# Altium PCB x-Link.PcbDoc
Units mm, origin at the board's own origin, x right, y up, seen from the top; angles counter-clockwise.
Board outline 30 x 18 mm, 2 copper layers (Top Layer, Bottom Layer), stack 1.06 mm thick; 48 components, 35 nets, 156 pads, 76 vias.
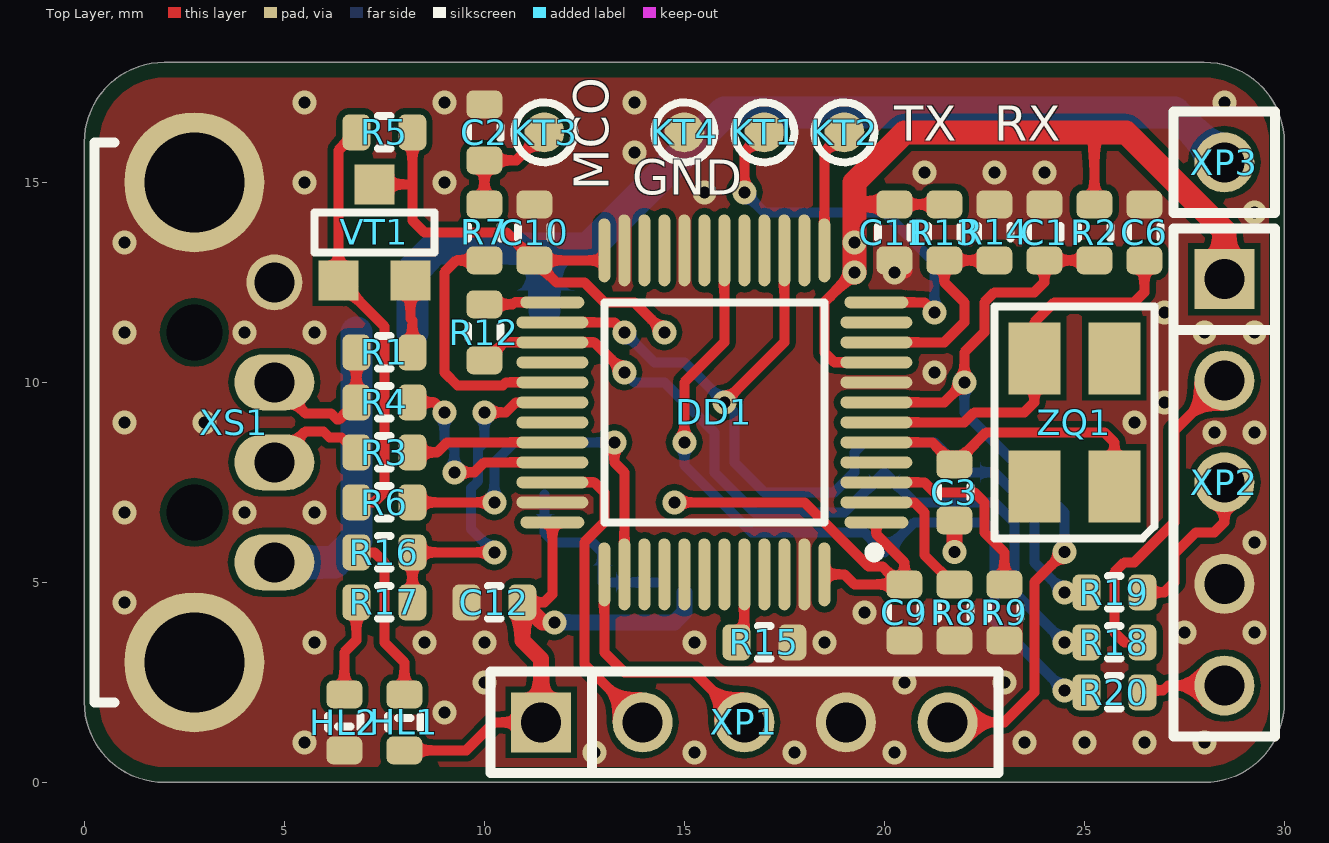
[diagram p0: Top Layer view]
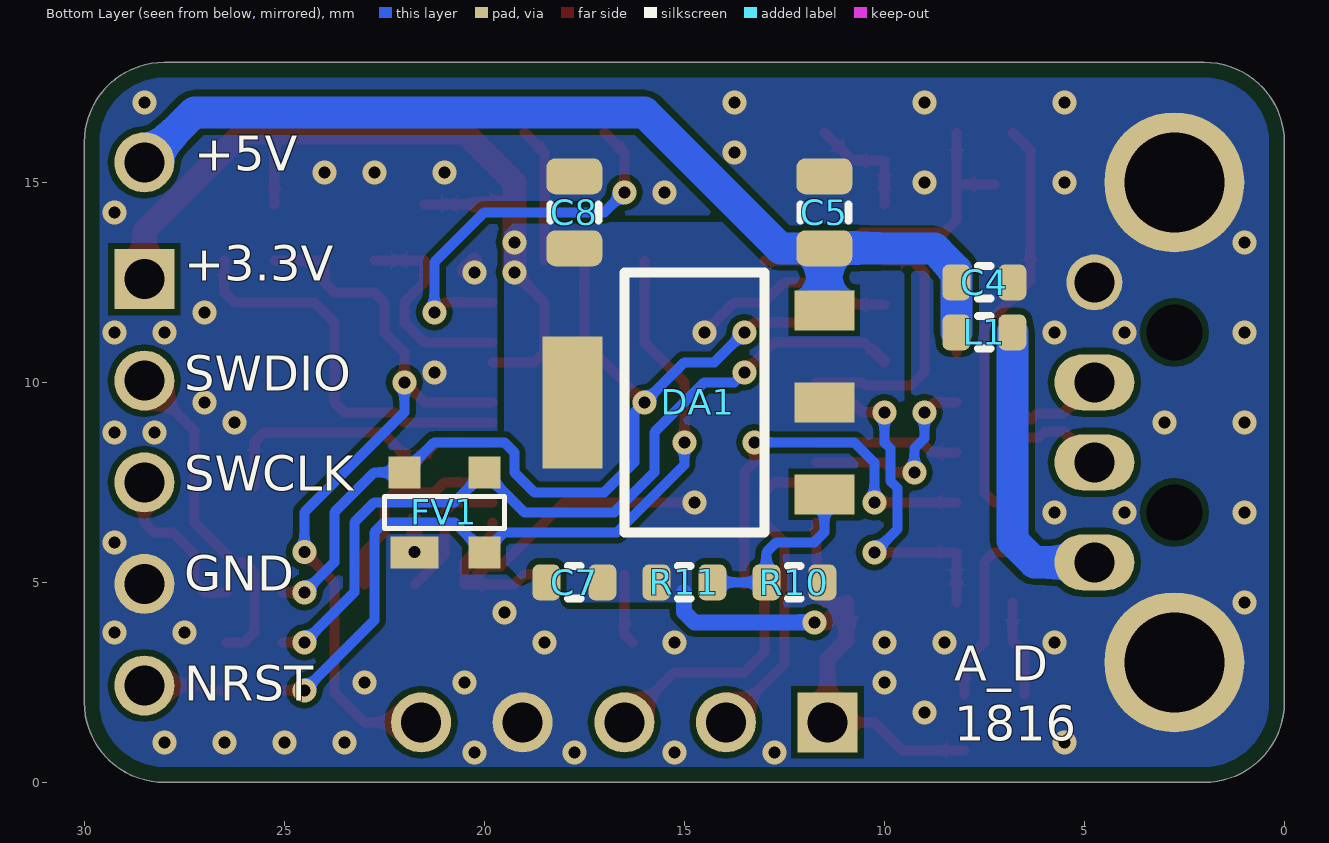
[diagram p1: Bottom Layer view, seen from below]

## Layer stack, top to bottom
Top Solder: solder mask 0.01, Solder Resist, Dk 3.5
Top Layer: signal copper 0.03
Dielectric1: core 1, FR-4, Dk 4.2
Bottom Layer: signal copper 0.03
Bottom Solder: solder mask 0.01, Solder Resist, Dk 3.5

## Board outline
0,2 0,16 cw(c2,16) 2,18 28,18 cw(c28,16) 30,16 30,2 cw(c28,2) 28,0 2,0 cw(c2,2)

## Design rules (kind name [scope] priority, off if disabled: settings)
BoardOutlineClearance [All] p1: gap=0.381 ignorepadtopadclearanceinfootprint=FALSE
Clearance [All] p1: gap=0.152 ignorepadtopadclearanceinfootprint=FALSE except(0: Arc-Hole Track-Hole SMDPad-Hole THPad-Hole Via-Hole Fill-Hole Poly-Hole Region-Hole Text-Hole)
ComponentClearance [All] p1: gap=0.25 collisioncheckmode=3 verticalgap=0.25 showdistances=FALSE
DiffPairsRouting [All] p1: maxlimit=10 minlimit=0.152 mostfreqgap=0.203 toplayer_minwidth=0.152 toplayer_maxwidth=0.381 toplayer_prefwidth=0.203 bottomlayer_minwidth=0.152 bottomlayer_maxwidth=0.381 bottomlayer_prefwidth=0.203 maxuncoupledlength=12.7
Height [All] p1: minheight=0 maxheight=25 prefheight=25
HoleSize [All] p1: absolutevalues=TRUE maxlimit=6.731 minlimit=0.3 maxpercent=80.000 minpercent=20.000
HoleToHoleClearance [All] p1: gap=0.254 allowstackedmicrovias=FALSE
MinimumAnnularRing [All] p1: minimumring=0.15
MinimumSolderMaskSliver [All] p1: minsoldermaskwidth=0
PlaneClearance [All] p1: clearance=0.5
PlaneConnect [All] p1: planeconnectstyle=Relief reliefexpansion=0.5 reliefentries=4 reliefconductorwidth=0.25 reliefairgap=0.25
PolygonConnect "Schematic Polygon Connect Style_6" [InNet('VCC5P0')] p1: connectstyle=Direct reliefconductorwidth=0.254 reliefentries=4 polygonreliefangle="45 Angle" airgapwidth=0.254
PolygonConnect "Schematic Polygon Connect Style_2" [InNet('GND')] p2: connectstyle=Direct reliefconductorwidth=0.254 reliefentries=4 polygonreliefangle="45 Angle" airgapwidth=0.254
PolygonConnect "Schematic Polygon Connect Style" [InNet('VCC3P3')] p3: connectstyle=Direct reliefconductorwidth=0.254 reliefentries=4 polygonreliefangle="45 Angle" airgapwidth=0.254
PolygonConnect [All] p4: connectstyle=Relief reliefconductorwidth=0.2 reliefentries=4 polygonreliefangle="90 Angle" airgapwidth=0.25
RoutingCorners [All] p1: cornerstyle=45-Degree minsetback=1.25 maxsetback=1.25
RoutingVias [All] p1: holewidth=0.3 width=0.6 viastyle="Through Hole" minholewidth=0.3 minwidth=0.6 maxholewidth=1 maxwidth=2
SMDEntry [All] p1: side=TRUE corner=TRUE anyangle=TRUE
SilkToSilkClearance [All] p1 off: silktosilkclearance=0
SilkToSolderMaskClearance [IsPad] p1 off: minsilkscreentomaskgap=0.152 clearancetoexposedcopper=TRUE
SolderMaskExpansion [All] p1: expansion=0.1
Width [All] p1: maxlimit=10.16 minlimit=0.152 preferedwidth=0.203
19 further rules are at their usual default settings.

## Classes and differential pairs
differential pair UD: +UD_P -UD_N
differential pair D: +D_P -D_N

## Components (designator, comment, footprint, x,y, rotation, side; value= is the part's Value field where it differs from the comment)
C1 "Capacitor" C0603_L 24,13.75 r270 top value=0.1uF
C2 "Capacitor" C0603_L 10,16.25 r270 top value=22pF
C3 "Capacitor" C0603_L 21.75,7.25 r90 top value=22pF
C4 "Capacitor" C0603_L 7.5,12.5 r0 bottom value=0.1uF
C5 "Capacitor" C0805_L 11.5,14.25 r90 bottom value=22uF
C6 "Capacitor" C0603_L 26.5,13.75 r270 top value=22pF
C7 "Capacitor" C0603_L 17.75,5 r180 bottom value=0.1uF
C8 "Capacitor" C0805_L 17.75,14.25 r90 bottom value=22uF
C9 "Capacitor" C0603_L 20.5,4.25 r90 top value=0.1uF
C10 "Capacitor" C0603_L 11.25,13.75 r270 top value=0.1uF
C11 "Capacitor" C0603_L 20.25,13.75 r90 top value=0.1uF
C12 "Capacitor" C0603_L 10.25,4.5 r0 top value=0.1uF
DA1 "LM1117-Series" SOT-223 14.75,9.5 r90 bottom value=LM1117MPX-ADJ
DD1 "STM32F103Cxxx-Series" LQFP-48 15.75,9.25 r180 top value=STM32F103C8T6
FV1 "SP0503BAHT" SOT-143 21,6.75 r180 bottom
HL1 "Text" LD0603_L 8,1.5 r90 top value=BL-LS0603GC
HL2 "Text" LD0603_L 6.5,1.5 r270 top value=BL-LS0603HC
KT1 "TX" TP-SMT-C-1mm-1 17,16.25 r0 top value=КТ-SMT-1
KT2 "RX" TP-SMT-C-1mm-1 19,16.25 r90 top value=КТ-SMT-1
KT3 "MCO" TP-SMT-C-1mm-1 11.5,16.25 r90 top value=КТ-SMT-1
KT4 "GND" TP-SMT-C-1mm-1 15,16.25 r90 top value=КТ-SMT-1
L1 "FerriteBead" L0603_L 7.5,11.25 r0 bottom value=BLM18PG331SN1
R1 "Resistor" R0603_L 7.5,10.75 r0 top value=1.5k
R2 "Resistor" R0603_L 25.25,13.75 r270 top value=10k
R3 "Resistor" R0603_L 7.5,8.25 r0 top value=22
R4 "Resistor" R0603_L 7.5,9.5 r0 top value=22
R5 "Resistor" R0603_L 7.5,16.25 r0 top value=4.7k
R6 "Resistor" R0603_L 7.5,7 r180 top value=100
R7 "Resistor" R0603_L 10,13.75 r90 top value=100
R8 "Resistor" R0603_L 21.75,4.25 r90 top value=10k
R9 "Resistor" R0603_L 23,4.25 r90 top value=10k
R10 "Resistor" R0603_L 12.25,5 r0 bottom value=0
R11 "Resistor" R0603_L 15,5 r0 bottom value=0
R12 "Resistor" R0603_L 10,11.25 r270 top value=100
R13 "Resistor" R0603_L 21.5,13.75 r90 top value=4.7k
R14 "Resistor" R0603_L 22.75,13.75 r270 top value=4.7k
R15 "Resistor" R0603_L 17,3.5 r180 top value=10k
R16 "Resistor" R0603_L 7.5,5.75 r0 top value=100
R17 "Resistor" R0603_L 7.5,4.5 r0 top value=100
R18 "Resistor" R0603_L 25.75,3.5 r0 top value=10
R19 "Resistor" R0603_L 25.75,4.75 r0 top value=10
R20 "Resistor" R0603_L 25.75,2.25 r0 top value=10
VT1 "BJT-NPN" SOT-23 7.25,13.75 r0 top value=BC847
XP1 "PROG" PLS-5 16.5,1.5 r0 top value=PLS-5
XP2 "SWD" PLS-5 28.5,7.5 r270 top value=PLS-5
XP3 "+5V" PLS-1 28.5,15.5 r0 top value=PLS-1
XS1 "Text" DS1097 3,9 r270 top locked value=DS1097-B
ZQ1 "Crystal" "SMD 5x3.2mm" 24.75,9 r90 top value="KX-9A 8.0 MHz 30/50/100 16 pF"

## Footprints (in the part's own frame and the unit in brackets; to place one, negate y for a bottom-side part, rotate by r counter-clockwise, add the part's x,y. Pads: shape width x height; smd on the part's side, far side on the other; paste and mask are expansions set on the pad)
C0603_L [mm] "Chip Capacitor; Body 1.6 x 0.8 mm (LxW typ)"
  rrect50% 0.7x0.9 smd: 1(-0.7,0) 2(0.7,0)
  silkscreen extent -0.15,-0.41 0.15,0.41, body extent -0.8,-0.4 0.8,0.4, height 0.91
C0805_L [mm] "Chip Capacitor; Body 2.0 x 1.2 mm (LxW typ)"
  rrect50% 0.9x1.4 smd: 1(-0.9,0) 2(0.9,0)
  silkscreen extent -0.2,-0.6 0.2,0.6, body extent -1,-0.62 1,0.63, height 1.01
DS1097 [mm]
  round 0 hole 1.4: 0(-2.25,-0.25) 0(2.25,-0.25)
  oval 1.4x2 hole 1: 1(3.5,1.75) 2(1,1.75) 3(-1,1.75)
  round 1.4 hole 1: 4(-3.5,1.75)
  round 3.5 hole 2.5: 5(-6,-0.25) 5(6,-0.25)
  silkscreen extent -7,-2.75 7,-2.25, body extent -6.3,-17.93 6.3,2, height 3.3
L0603_L [mm] "Chip Coil; Body 1.6 x 0.8 mm (LxW typ)"
  rrect50% 0.7x0.9 smd: 1(-0.7,0) 2(0.7,0)
  silkscreen extent -0.15,-0.41 0.15,0.41, body extent -0.8,-0.48 0.8,0.47, height 0.8
LD0603_L [mm] "Chip Led; Body 1.6 x 0.8 mm (LxW typ)"
  rrect50% 0.7x0.9 smd mask+0.05: 1(-0.7,0) 2(0.7,0)
  silkscreen extent -0.15,-0.41 0.15,0.41, body extent -0.8,-0.4 0.8,0.4, height 0.7
LQFP-48 [mm] "Thin QFP, 48-Leads, Body 7x7mm, Pitch 0.5mm, IPC Medium Density"
  oval 1.6x0.3 smd: 1(-4.05,2.75) 12(-4.05,-2.75) 25(4.05,-2.75) 36(4.05,2.75)
  oval 1.8x0.3 smd: 2(-4.05,2.25) 3(-4.05,1.75) 4(-4.05,1.25) 5(-4.05,0.75) 6(-4.05,0.25) 7(-4.05,-0.25) 8(-4.05,-0.75) 9(-4.05,-1.25) 10(-4.05,-1.75) 11(-4.05,-2.25) 26(4.05,-2.25) 27(4.05,-1.75) 28(4.05,-1.25) 29(4.05,-0.75) 30(4.05,-0.25) 31(4.05,0.25) 32(4.05,0.75) 33(4.05,1.25) 34(4.05,1.75) 35(4.05,2.25)
  oval 0.3x1.6 smd: 13(-2.75,-4.05) 24(2.75,-4.05) 37(2.75,4.05) 48(-2.75,4.05)
  oval 0.3x1.8 smd: 14(-2.25,-4.05) 15(-1.75,-4.05) 16(-1.25,-4.05) 17(-0.75,-4.05) 18(-0.25,-4.05) 19(0.25,-4.05) 20(0.75,-4.05) 21(1.25,-4.05) 22(1.75,-4.05) 23(2.25,-4.05) 38(2.25,4.05) 39(1.75,4.05) 40(1.25,4.05) 41(0.75,4.05) 42(0.25,4.05) 43(-0.25,4.05) 44(-0.75,4.05) 45(-1.25,4.05) 46(-1.75,4.05) 47(-2.25,4.05)
  silkscreen extent -4.13,-2.75 2.75,3.62, body extent -4.5,-4.5 4.5,4.5, height 1.5
PLS-1 [mm]
  round 1.5 hole 1: 1(0,0)
  silkscreen extent -1.27,-1.27 1.27,1.27, body extent -1.25,-1.25 1.25,1.25, height 9
PLS-5 [mm]
  rect 1.5x1.5 hole 1: 1(-5.08,0)
  round 1.5 hole 1: 2(-2.54,0) 3(0,0) 4(2.54,0) 5(5.08,0)
  silkscreen extent -6.35,-1.27 6.35,1.27, body extent -6.35,-1.27 6.35,1.27, height 8.9
R0603_L [mm] "Chip Resistor; Body 1.6 x 0.8 mm (LxW typ)"
  rrect50% 0.7x0.9 smd: 1(-0.7,0) 2(0.7,0)
  silkscreen extent -0.15,-0.41 0.15,0.41, body extent -0.8,-0.41 0.8,0.41, height 0.46
"SMD 5x3.2mm" [mm]
  rect 1.8x1.3 smd: 1(-1.6,-1) 2(1.6,-1) 3(1.6,1) 4(-1.6,1)
  silkscreen extent -2.9,-2 2.9,2, body extent -2.5,-1.6 2.5,1.6, height 1.01
SOT-23 [mm] "КТ-46"
  rect 1x1 smd: 1(-0.9,-1.2) 2(0,1.2) 3(0.9,-1.2)
  silkscreen extent -1.5,-0.5 1.5,0.5, body extent -1.5,-1.15 1.5,1.15, height 1.11
SOT-143 [mm]
  rect 1.2x0.8 smd: 1(-0.75,-1)
  rect 0.8x0.8 smd: 2(1,-1) 3(1,1) 4(-1,1)
  silkscreen extent -1.5,-0.4 1.5,0.4, body extent -1.45,-1.18 1.45,1.18, height 1.23
SOT-223 [mm]
  rect 1x1.5 smd: 1(-2.3,-3.25) 2(0,-3.25) 3(2.3,-3.25)
  rect 3.3x1.5 smd: 2(0,3.05)
  silkscreen extent -3.25,-1.75 3.25,1.75, body extent -3.25,-3.53 3.25,3.43, height 1.65
TP-SMT-C-1mm-1 [mm] "Test Point, Surface Mounting, Circular, Pad Diameter 1mm"
  round 1 smd paste-1: 1(0,0)
  silkscreen extent -0.75,-0.75 0.75,0.75

## Part data
C1 C4 C7 C9 C10 C11 C12: library part GRM188R71C104KA01D, Dielectric Type=X7R, Manufacturer=Murata, Tolerance=±10%, Voltage=16V, Working Temperature Max=+125°С, Working Temperature Min=-55°С, Application Category=1, ID=131, Part Number=GRM188R71C104KA01D, Published=18.05.2010, Publisher="Andrew Danich", Type=Конденсатор
C2 C3 C6: library part GRM1885C1H220JA01D, Dielectric Type=NP0, Manufacturer=Murata, Tolerance=±5%, Voltage=50V, Working Temperature Max=+125°С, Working Temperature Min=-55°С, Application Category=1, ID=122, Part Number=GRM1885C1H220JA01D, Published=18.05.2010, Publisher="Andrew Danich", Type=Конденсатор
C5 C8: library part GRM21BR60J226ME39L, Dielectric Type=X5R, Manufacturer=Murata, Tolerance=±20%, Voltage=6.3V, Working Temperature Max=+85°С, Working Temperature Min=-55°С, Application Category=1, ID=140, Part Number=GRM21BR60J226ME39L, Published=18.05.2010, Publisher="Andrew Danich", Type=Конденсатор
DA1: library part LM1117MPX-ADJ, Input Voltage=+8.5…20V, Output Current=800mA, Output Voltage=+ADJ, ID=5, Part Number=LM1117MPX-ADJ, Published=13.08.2015, Publisher="Andrew Danich", Type=Микросхема
DD1: library part STM32F103C8T6, Manufacturer=STMicroelectronics, Operation Frequency=72MHz, Working Temperature Max=+85°С, Working Temperature Min=-40°С, Application Category=1, Flash=64K, I/O Lines=37, ID=20, Part Number=STM32F103C8T6, Prog Interface="SWD, UART", Published=16.10.2015, Publisher="Andrew Danich", SRAM=20K, Supply Operation=+2.0…3.6V, Type=Микросхема
FV1: Breakdown Voltage=6.8V, Junction Capacitance=30pF, Manufacturer=LittleFuse, Reverse Stand Off Voltage=5.5V, Working Temperature Max=+85°С, Working Temperature Min=-40°С, Application Category=1, Directional=Bidirectional, Functional Analog=-, ID=7, Part Number=SP0503BAHT, Published=11.04.2016, Publisher="Andrew Danich", Type=Супрессор
HL1: library part BL-LS0603GC, Color=Green, Forward Current=30mA, Forward Voltage=2.3V, Power Dissipation=65mW, ID=14, Leds=1, Part Number=BL-LS0603GC, Published=03.12.2013, Publisher="Andrew Danich", Type="Индикатор единичный"
HL2: library part BL-LS0603HC, Color=Red, Forward Current=30mA, Forward Voltage=2.2V, Power Dissipation=65mW, ID=13, Leds=1, Part Number=BL-LS0603HC, Published=03.12.2013, Publisher="Andrew Danich", Type="Индикатор единичный"
KT1 KT2 KT3 KT4: library part КТ-SMT-1, Limit Voltage=50V, Manufacturer=-, Rated Current=0.5A, Application Category=-, Functional Analog=-, ID=12, Part Number=КТ-SMT-1, Published=03.03.2015, Publisher="Andrew Danich", Working Temperature Max=-, Working Temperature Min=-
L1: library part BLM18PG331SN1, DC Resistance=0.15ohm, Inductor Type=EMIFIL, Manufacturer=Murata, Rated Current=1.2A, Working Temperature Max=+125°С, Working Temperature Min=-55°С, Application Category=1, ID=1, Impedance at 100Mhz=0.15ohm, Part Number=BLM18PG331SN1, Published=14.11.2014, Publisher="Andrew Danich", Type=Дроссель
R1: library part RC0603JR-071K5L, Limit Voltage=50V, Manufacturer=Yageo, Temperature Coefficient=100ppm, Tolerance=±5%, Total Power Dissipation=0.1W, Working Temperature Max=+155°С, Working Temperature Min=-55°С, Application Category=1, ID=8, Part Number=RC0603JR-071K5L, Published=24.03.2010, Publisher="Andrew Danich", Series Type=Thick-Film, Type=Резистор
R2 R8 R9 R15: library part RC0603JR-0710KL, Limit Voltage=50V, Manufacturer=Yageo, Temperature Coefficient=100ppm, Tolerance=±5%, Total Power Dissipation=0.1W, Working Temperature Max=+155°С, Working Temperature Min=-55°С, Application Category=1, Functional Analog=CR0603-JW-103E, ID=12, Part Number=RC0603JR-0710KL, Published=24.03.2010, Publisher="Andrew Danich", Series Type=Thick-Film, Type=Резистор
R3 R4: library part RC0603JR-0722RL, Limit Voltage=50V, Manufacturer=Yageo, Temperature Coefficient=100ppm, Tolerance=±5%, Total Power Dissipation=0.1W, Working Temperature Max=+155°С, Working Temperature Min=-55°С, Application Category=1, ID=29, Part Number=RC0603JR-0722RL, Published=24.03.2010, Publisher="Andrew Danich", Series Type=Thick-Film, Type=Резистор
R5 R13 R14: library part RC0603JR-074K7L, Limit Voltage=50V, Manufacturer=Yageo, Temperature Coefficient=100ppm, Tolerance=±5%, Total Power Dissipation=0.1W, Working Temperature Max=+155°С, Working Temperature Min=-55°С, Application Category=1, ID=56, Part Number=RC0603JR-074K7L, Published=24.03.2010, Publisher="Andrew Danich", Series Type=Thick-Film, Type=Резистор
R6 R7 R12 R16 R17: library part RC0603JR-07100R, Limit Voltage=50V, Manufacturer=Yageo, Temperature Coefficient=100ppm, Tolerance=±5%, Total Power Dissipation=0.1W, Working Temperature Max=+155°С, Working Temperature Min=-55°С, Application Category=1, Functional Analog=CR0603-JW-101E, ID=10, Part Number=RC0603JR-07100R, Published=24.03.2010, Publisher="Andrew Danich", Series Type=Thick-Film, Type=Резистор
R10 R11: library part RC0603JR-070R, Limit Voltage=50V, Manufacturer=Yageo, Temperature Coefficient=100ppm, Tolerance=±5%, Total Power Dissipation=0.1W, Working Temperature Max=+155°С, Working Temperature Min=-55°С, Application Category=1, Functional Analog="RC0603FR-070RL, CR0603-J/-000E", ID=5, Part Number=RC0603JR-070R, Published=24.03.2010, Publisher="Andrew Danich", Series Type=Thick-Film, Type=Резистор
R18 R19 R20: library part RC0603JR-0710RL, Limit Voltage=50V, Manufacturer=Yageo, Temperature Coefficient=100ppm, Tolerance=±5%, Total Power Dissipation=0.1W, Working Temperature Max=+155°С, Working Temperature Min=-55°С, Application Category=1, Functional Analog=CR0603-JW-100E, ID=9, Part Number=RC0603JR-0710RL, Published=24.03.2010, Publisher="Andrew Danich", Series Type=Thick-Film, Type=Резистор
VT1: library part BC847, C-E Saturation Voltage=0.6V, C-E Voltage=45V, Collector Current=100mA, DC Current Gain=110…800, Total Power Dissipation=250mW, Transition Frequency=100MHz, Application Category=1, ID=1, Part Number=BC847, Published=07.05.2013, Publisher="Andrew Danich", Type=Транзистор
XP1 XP2: library part PLS-5, Limit Current=3A, Limit Voltage=250V, Resistance=15momh, Connector Type=Male, ID=4, Part Number=PLS-5, Pins=5, Pitch=2.54mm, Published=07.03.2013, Publisher="Andrew Danich", Surface Finish=Gold, Type=Вилка
XP3: library part PLS-1, Limit Current=3A, Limit Voltage=250V, Resistance=15momh, Connector Type=Male, ID=8, Part Number=PLS-1, Pins=1, Pitch=2.54mm, Published=07.03.2013, Publisher="Andrew Danich", Surface Finish=Gold, Type=Вилка
XS1: library part DS1097-B, Limit Current=1.5A, Limit Voltage=30V, Manufacturer="Connfly Electronic Co., Ltd", Application Category=1, Connector Type=Male, Functional Analog="USB-AR, DS1097-W", ID=3, Interface="USB 2.0", Max Data Rate="480 mbps", Mount Type="Through hole", Part Number=DS1097-B, Pins=6, Published=13.08.2015, Publisher="Andrew Danich", Type=Вилка
ZQ1: library part "KX-9A 8.0 MHz 30/50/100 16 pF", Load Capacitance=16pF, Manufacturer=Geyer, Output Frequency=8MHz, Shunt Capacitance=5pF, Temperature Coefficient=±50ppm, Working Temperature Max=+70°С, Working Temperature Min=-20°С, Application Category=1, Functional Analog=-, ID=12, Part Number="KX-9A 8.0 MHz 30/50/100 16 pF", Published=08.03.2013, Publisher="Andrew Danich", Type=Резонатор

## Via types
v1: diameter 0.6, hole 0.3, Top Layer to Bottom Layer, tented both sides, 76 vias

## Nets (pads, with @x,y where several pads share a name; then routed paths per layer and width w, separated by ;. In a path a pad name is that pad's centre, name@x,y a point inside that pad or via, vN(x,y) a via of type N, cw(c..) or ccw(c..) an arc to the next point about the centre after c; other vN are vias at no path point)
AIN_1: DD1.10 R13.1 R14.2 | length 5.4
  Top Layer w0.25: DD1.10 21.5,11 22,11.5 22,12 21.5,12.5 R13.1 R14.2
BOOT0: DD1.44 R15.2 | length 1.8
  Top Layer w0.25: R15.2 16.5,3.7 DD1.44
D_N: DD1.32 R3.2 | length 3.6
  Top Layer w0.25: R3.2 8.822,8.25 9.072,8.5 DD1.32
D_P: DD1.33 R4.2 | length 5.1
  Top Layer w0.25: R4.2 8.75,9.5 v1(9,9.25) ; v1(9.25,7.75) 9.75,7.75 10,8 DD1.33
  Bottom Layer w0.25: v1(9,9.25) 9,8.598 9.25,8.348 v1(9.25,7.75)
GND: C1.1 C2.1 C3.1 C4.1 C5.2 C6.1 C7.1 C8.2 C9.1 C10.1 C11.1 C12.1 DD1.8 DD1.20 DD1.23 DD1.35 DD1.47 FV1.1 HL2.2 KT4.1 R8.1 R9.1 R10.1 R14.1 R15.1 XP1.4 XP2.4 XS1.4 XS1.5 | length 1.2
  Top Layer w0.4: C11.1 C11.1@20.5,12.8 ; v1(21.75,5.752) C3.1
  other v1: 12.75,0.75 15.25,0.75 17.75,0.75 20.25,0.75 5.5,1 23.5,1 25,1 26.5,1 28,1 9,1.75 10,2.5 20.5,2.5 23,2.5 5.75,3.5 8.5,3.5 10,3.5 15.25,3.5 18.5,3.5 27.5,3.75 29.25,3.75 19.5,4.25 1,4.5 29.25,6 1,6.75 4,6.75 5.75,6.75 28.25,8.75 29.25,8.75 1,9 3,9 26.25,9 27,9.5 21.25,10.25 1,11.25 4,11.25 5.75,11.25 28,11.25 29.25,11.25 27,11.75 20.25,12.75 1,13.5 29.25,14.25 15.5,14.75 5.5,15 9,15 21,15.25 22.75,15.25 24,15.25 13.75,15.75 5.5,17 9,17 13.75,17 28.5,17
LEDS: DD1.30 R16.2 R17.2 | length 9
  Top Layer w0.25: R17.2 R16.2 v1(10.25,5.75) ; v1(10,9.25) 10.54,9.25 10.79,9.5 DD1.30
  Bottom Layer w0.25: 9.827,7.531 9.827,7.511 9.673,7.356 9.673,6.327 v1(10.25,5.75) ; 9.848,7.531 9.848,8.348 10,8.5 v1(10,9.25)
MCO: C2.2 KT3.1 R7.2 | length 2.9
  Top Layer w0.25: R7.2 C2.2 10.8,15.55 KT3.1
NetC3_2: C3.2 DD1.5 ZQ1.1 | length 7.7
  Top Layer w0.25: DD1.5 21.2,8.5 C3.2 22.55,8.75 25.5,8.75 25.75,8.5 ZQ1.1
NetC6_2: C6.2 DD1.6 ZQ1.3 | length 10
  Top Layer w0.25: DD1.6 22,9 22.25,9.25 23.5,9.25 23.75,9.5 ZQ1.3 23.75,11.5 24.25,12 26.25,12 26.5,12.25 C6.2
NetDA1_1: DA1.1 R10.2 R11.1 | length 4.7
  Bottom Layer w0.25: DA1.1 11.5,6.25 11.75,6 12.7,6 12.95,5.75 R10.2 R11.1
NetDD1_2: DD1.2 R8.2 | length 3.4
  Top Layer w0.25: DD1.2 20.75,7 21,6.75 21,5.683 21.733,4.95 R8.2
NetDD1_3: DD1.3 R9.2 | length 5.2
  Top Layer w0.25: DD1.3 21,7.5 21.25,7.25 22.25,7.25 22.5,7 22.5,6.25 23,5.75 R9.2
NetDD1_25: DD1.25 R12.1 | length 1.7
  Top Layer w0.25: R12.1 10.7,11.95 10.75,12 DD1.25
NetDD1_29: DD1.29 R7.1 | length 6.5
  Top Layer w0.25: R7.1 9.3,13.05 9,12.75 9,10.25 9.327,9.923 10.462,9.923 10.54,10 DD1.29
NetHL1_2: HL1.2 R16.1 | length 4.3
  Top Layer w0.25: R16.1 7.25,5.75 7.5,5.5 7.5,3.5 8,3 HL1.2
NetHL2_1: HL2.1 R17.1 | length 2.4
  Top Layer w0.25: HL2.1 6.5,3.25 6.8,3.55 R17.1
NetL1_1: L1.1 XS1.1 | length 7.5
  Bottom Layer w0.8: XS1.1 6.25,5.5 6.8,6.05 L1.1
NetR1_2: R1.2 VT1.3 | length 1.8
  Top Layer w0.25: VT1.3 8.15,11.6 8.2,11.55 R1.2
NetR5_1: R5.1 R6.2 VT1.1 | length 10.5
  Top Layer w0.25: R6.2 7.25,7 7.5,7.25 7.5,11.4 VT1.1 6.35,15.8 R5.1
NetR18_2: R18.2 XP2.2 | length 8.4
  Top Layer w0.25: R18.2 26,3.5 25.75,3.75 25.75,5.25 26,5.5 26.25,5.5 27.25,6.5 27.25,8.79 XP2.2
NetR19_2: R19.2 XP2.3 | length 4.2
  Top Layer w0.25: R19.2 27,4.75 27.25,5 27.25,5.711 27.789,6.25 28.25,6.25 28.5,6.5 XP2.3
NetR20_2: R20.2 XP2.5 | length 2.1
  Top Layer w0.25: R20.2@26.45,2.3 26.97,2.3 27.09,2.42 XP2.5
NRST: DD1.18 FV1.2 R20.1 | length 19.8
  Top Layer w0.25: v1(15,8.5) 15,10 16,11 DD1.18@16,13.05 ; v1(24.5,2.3) R20.1@25.05,2.3
  Bottom Layer w0.25: v1(15,8.5) 15,7.931 16.681,6.25 19.5,6.25 FV1.2 20.75,6.5 22.5,6.5 22.75,6.25 22.75,4.05 v1(24.5,2.3)
PROG_nRST: C1.2 DD1.7 R2.2 XP1.5 | length 19.7
  Top Layer w0.25: DD1.7 21.5,9.5 v1(22,10) 22,10.75 22.5,11.25 22.5,12 22.75,12.25 23.75,12.25 24,12.5 C1.2 R2.2 ; XP1.5 23,1.5 23.75,2.25 23.75,5.002 v1(24.5,5.752)
  Bottom Layer w0.25: v1(22,10) 22,9.25 24.5,6.75 v1(24.5,5.752)
PROG_SWCLK: DD1.37 XP1.3 | length 6.2
  Top Layer w0.25: DD1.37 13,3.25 13.5,2.75 15.25,2.75 XP1.3
PROG_SWDIO: DD1.34 XP1.2 | length 8
  Top Layer w0.25: DD1.34 12.75,7.5 13,7.25 13,6.5 12.5,6 12.5,2.96 XP1.2
RX: DD1.13 KT2.1 | length 3.4
  Top Layer w0.25: DD1.13@18.5,13.05 18.5,15.75 KT2.1
SWCLK: DD1.15 DD1.26 FV1.4 R19.1 | length 23.1
  Top Layer w0.25: DD1.26@11.75,11.5 13.25,11.5 v1(13.5,11.25) ; v1(16,9.5) 17.5,11 DD1.15@17.5,13.05 ; v1(24.5,4.75) R19.1
  Bottom Layer w0.25: v1(13.5,11.25) 14.25,10.5 15,10.5 v1(16,9.5) 16.25,9.25 16.25,8 17,7.25 18.75,7.25 19.25,7.75 19.25,8.25 19.5,8.5 21.25,8.5 FV1.4 22.75,7.75 23.75,6.75 23.75,5.5 v1(24.5,4.75)
SWDIO: DD1.27 FV1.3 R12.2 R18.1 | length 21.1
  Top Layer w0.25: R12.2@10,10.5 10.5,11 DD1.27 12.75,11 v1(13.5,10.25) ; R12.2 R12.2@10.2,10.75 ; v1(24.5,3.5) R18.1
  Bottom Layer w0.25: v1(13.5,10.25) 13.75,10 14.5,10 15.75,8.75 15.75,7.75 16.75,6.75 19,6.75 FV1.3 20.75,7 22.75,7 23.25,6.5 23.25,4.75 v1(24.5,3.5)
TX: DD1.12 KT1.1 | length 10
  Top Layer w0.25: v1(16.5,14.75) 16.5,15.75 KT1.1 ; DD1.12 21,12 v1(21.25,11.75)
  Bottom Layer w0.25: v1(16.5,14.75) 17,14.25 20,14.25 21.25,13 v1(21.25,11.75)
UD_N: R3.1 XS1.2 | length 2.6
  Top Layer w0.25: XS1.2 5.523,8.773 5.977,8.773 6.133,8.617 6.433,8.617 R3.1
UD_P: R1.1 R4.1 XS1.3 | length 3.8
  Top Layer w0.25: XS1.3 5.523,9.227 6.164,9.227 6.32,9.07 6.37,9.07 R4.1 R1.1@6.8,10.7
UEN: DD1.38 R6.1 | length 9.9
  Top Layer w0.25: R6.1 v1(10.25,7) ; v1(13.25,8.5) 13.25,8 13.5,7.75 DD1.38 DD1.38@13.5,4.95
  Bottom Layer w0.25: v1(10.25,7) 10.25,7.992 10.758,8.5 v1(13.25,8.5)
VCC3P3: C7.2 C8.1 C9.2 C10.2 C11.2 C12.2 DA1.2 DD1.1 DD1.9 DD1.24 DD1.36 DD1.48 HL1.1 R2.1 R5.2 R11.2 R13.2 VT1.2 XP1.1 XP2.1 | length 59.2
  Top Layer w0.25: VT1.2 8.15,14.95 8.2,15 ; HL1.1 9.55,0.8 10.25,1.5 XP1.1 ; R5.2 8.2,15 ; C12.2 11.5,4.5 11.7,4.7 DD1.36 ; DD1.24@13,13.05 C10.2 ; v1(14.5,11.25) 13.75,12 13,12 12.5,12.5 11.8,12.5 C10.2 ; v1(14.75,7) 18,7 19.6,5.4 19.95,5.4 20.4,4.95 19.25,4.95 19,5.2 DD1.48 ; v1(19.25,12.75) 18.5,12 18.5,10.75 18.75,10.5 DD1.9 ; DD1.1 19.8,6.2 20.5,5.5 C9.2 ; C11.2 R13.2 ; R2.1 25.25,16.25 ; 8.2,15 8.2,14.05 8.5,13.75 10.55,13.75 C10.2
  Top Layer w0.4: XP1.1 11.42,3.08 10.95,3.55 C12.2 11.45,4 v1(11.75,4) ; 19.25,14.25 19.45,14.45 C11.2
  Top Layer w0.6: v1(19.25,12.75) v1(19.25,13.5) 19.25,14.25 19.25,15 20.5,16.25 25.25,16.25 26.037,16.25 28.5,13.787 XP2.1
  Bottom Layer w0.4: v1(11.75,4) 14.75,4 15.002,4.252 15.002,4.75
VCC5P0: C4.2 C5.1 DA1.3 L1.2 XP3.1 | length 25.6
  Bottom Layer w0.8: L1.2 C4.2 8.2,12.8 8.75,13.35 C5.1 ; DA1.3 C5.1 ; XP3.1 27.25,16.75 16,16.75 12.6,13.35 C5.1
pads on no net: DD1.4 DD1.11 DD1.14 DD1.16 DD1.17 DD1.19 DD1.21 DD1.22 DD1.28 DD1.31 DD1.39 DD1.40 DD1.41 DD1.42 DD1.43 DD1.45 DD1.46 XS1.0 ZQ1.2 ZQ1.4

## Polygon pours and split planes (outlines as drawn)
GND on Bottom Layer "Bottom Layer-GND" (solid, remove dead copper, pour order 26): 0,0 30,0 30,18 0,18
VCC3P3 on Bottom Layer "Bottom Layer-VCC3P3" (solid, remove dead copper, pour order 18): 18.5,4.5 10.5,4.5 9.5,5.5 9.5,13 10.5,14 19.25,14 19.5,13.75 19.5,5.5
GND on Top Layer "Top Layer-GND" (solid, remove dead copper, pour order 28): 0,0 0,18 30,18 30,0

## Silkscreen, mask and mechanical layers (free items; w line width, h text height)
Bottom Overlay:
  text "+5V" at 27.25,15 h1.5
  text "+3.3V" at 27.5,12.25 h1.5
  text "SWDIO" at 27.5,9.5 h1.5
  text "SWCLK" at 27.5,7 h1.5
  text "GND" at 27.5,4.5 h1.5
  text "A_D" at 8.25,2.25 h1.5
  text "NRST" at 27.5,1.75 h1.5
  text "1816" at 8.25,0.75 h1.5
1 - Board Outline:
  the board outline again, w0.1
11 - Dementions (Top):
  lines w0.254: -3.508,1.524 -3,0 ; -3.508,16.476 -3,18 ; -3.254,0 -2.746,0 ; -3.254,18 -2.746,18 ; -3,4.023 -3,0 ; -3,13.977 -3,18 ; -2.492,1.524 -3,0 ; -2.492,16.476 -3,18 ; 0,-2.754 0,-2.246 ; 1.524,-3.008 0,-2.5 ; 1.524,-1.992 0,-2.5 ; 9.896,-2.5 0,-2.5 ; 20.104,-2.5 30,-2.5 ; 28.476,-3.008 30,-2.5 ; 28.476,-1.992 30,-2.5 ; 30,-2.754 30,-2.246
  text "18 (mm)" at -2.086,4.277 h1.52 r90
  text "30 (mm)" at 10.15,-3.414 h1.52